# Altium PCB Copy of Marker.PcbDoc
Units mm, origin at the board's own origin, x right, y up, seen from the top; angles counter-clockwise.
Board outline 59.69 x 64.39 mm, 2 copper layers (Top Layer, Bottom Layer); 11 components, 28 nets, 78 pads, 0 vias.
Unrouted connection lines stored in the file: 1.
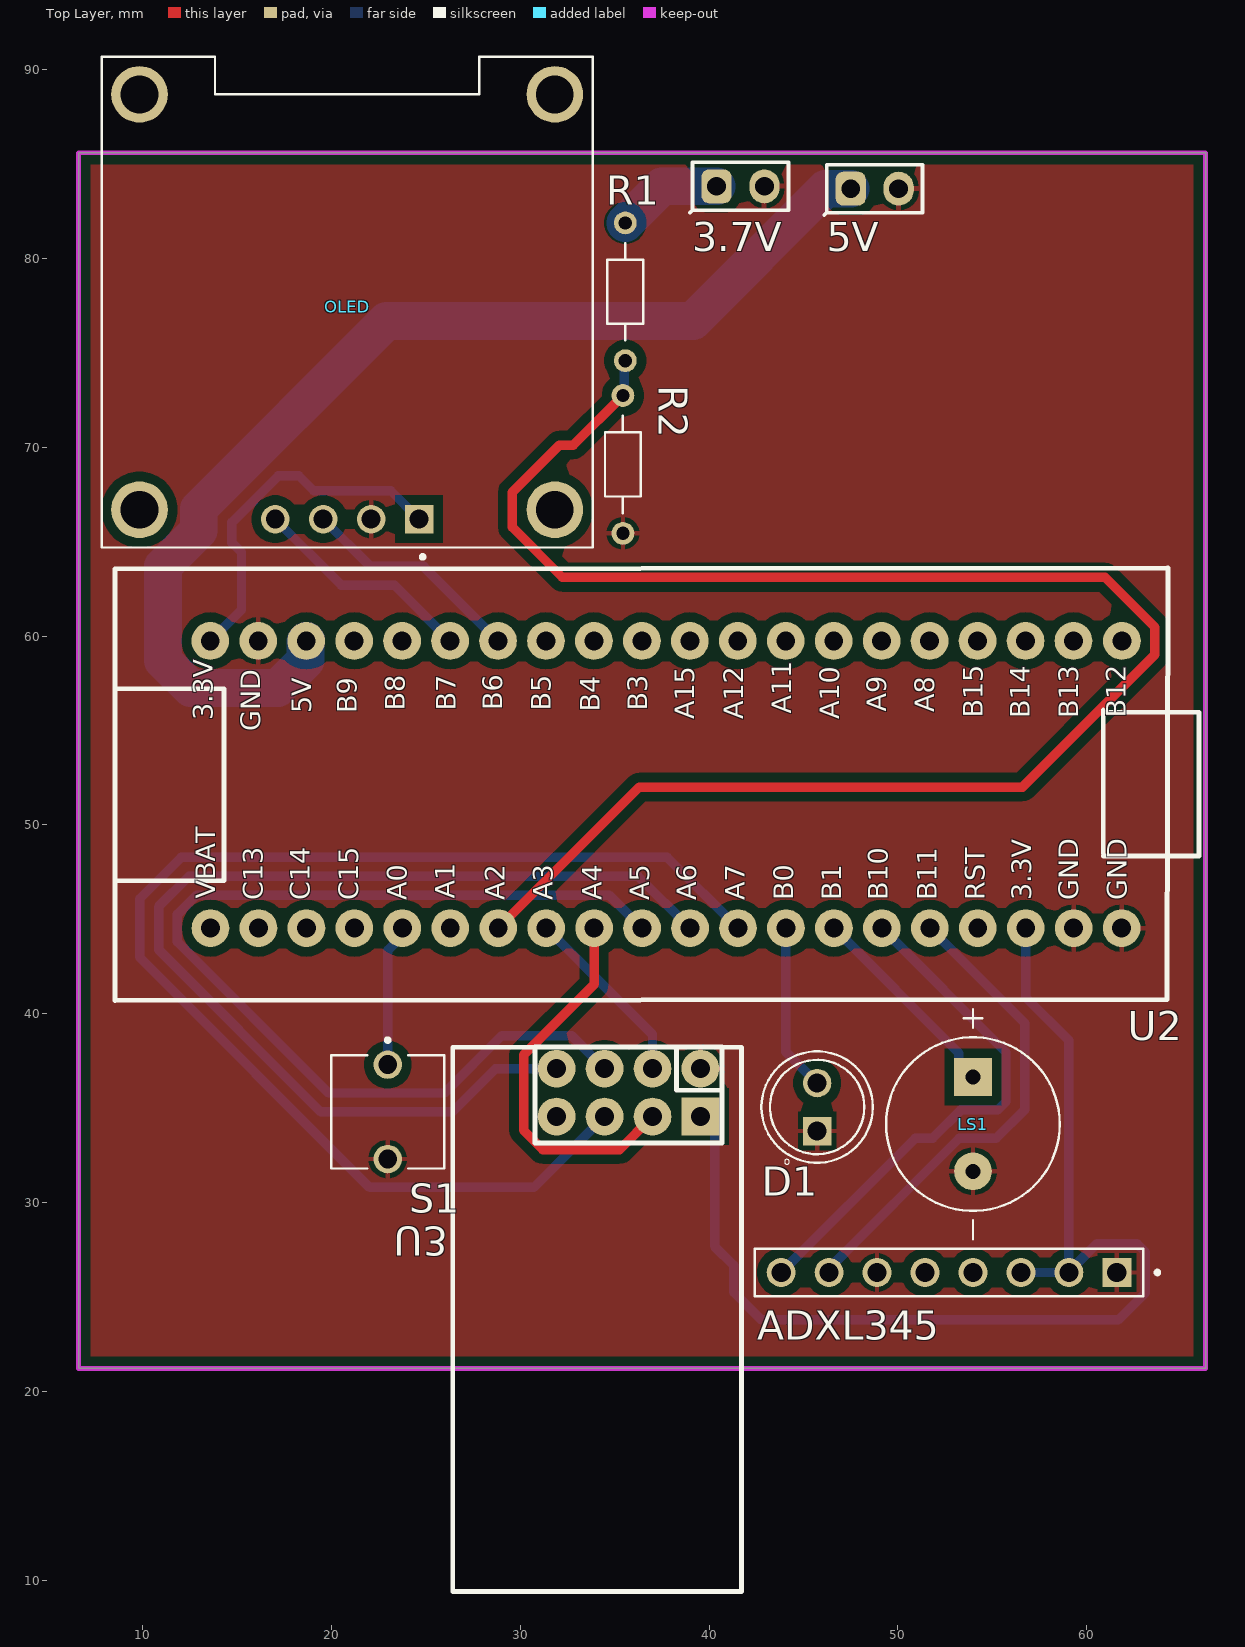
[diagram p0: Top Layer view]
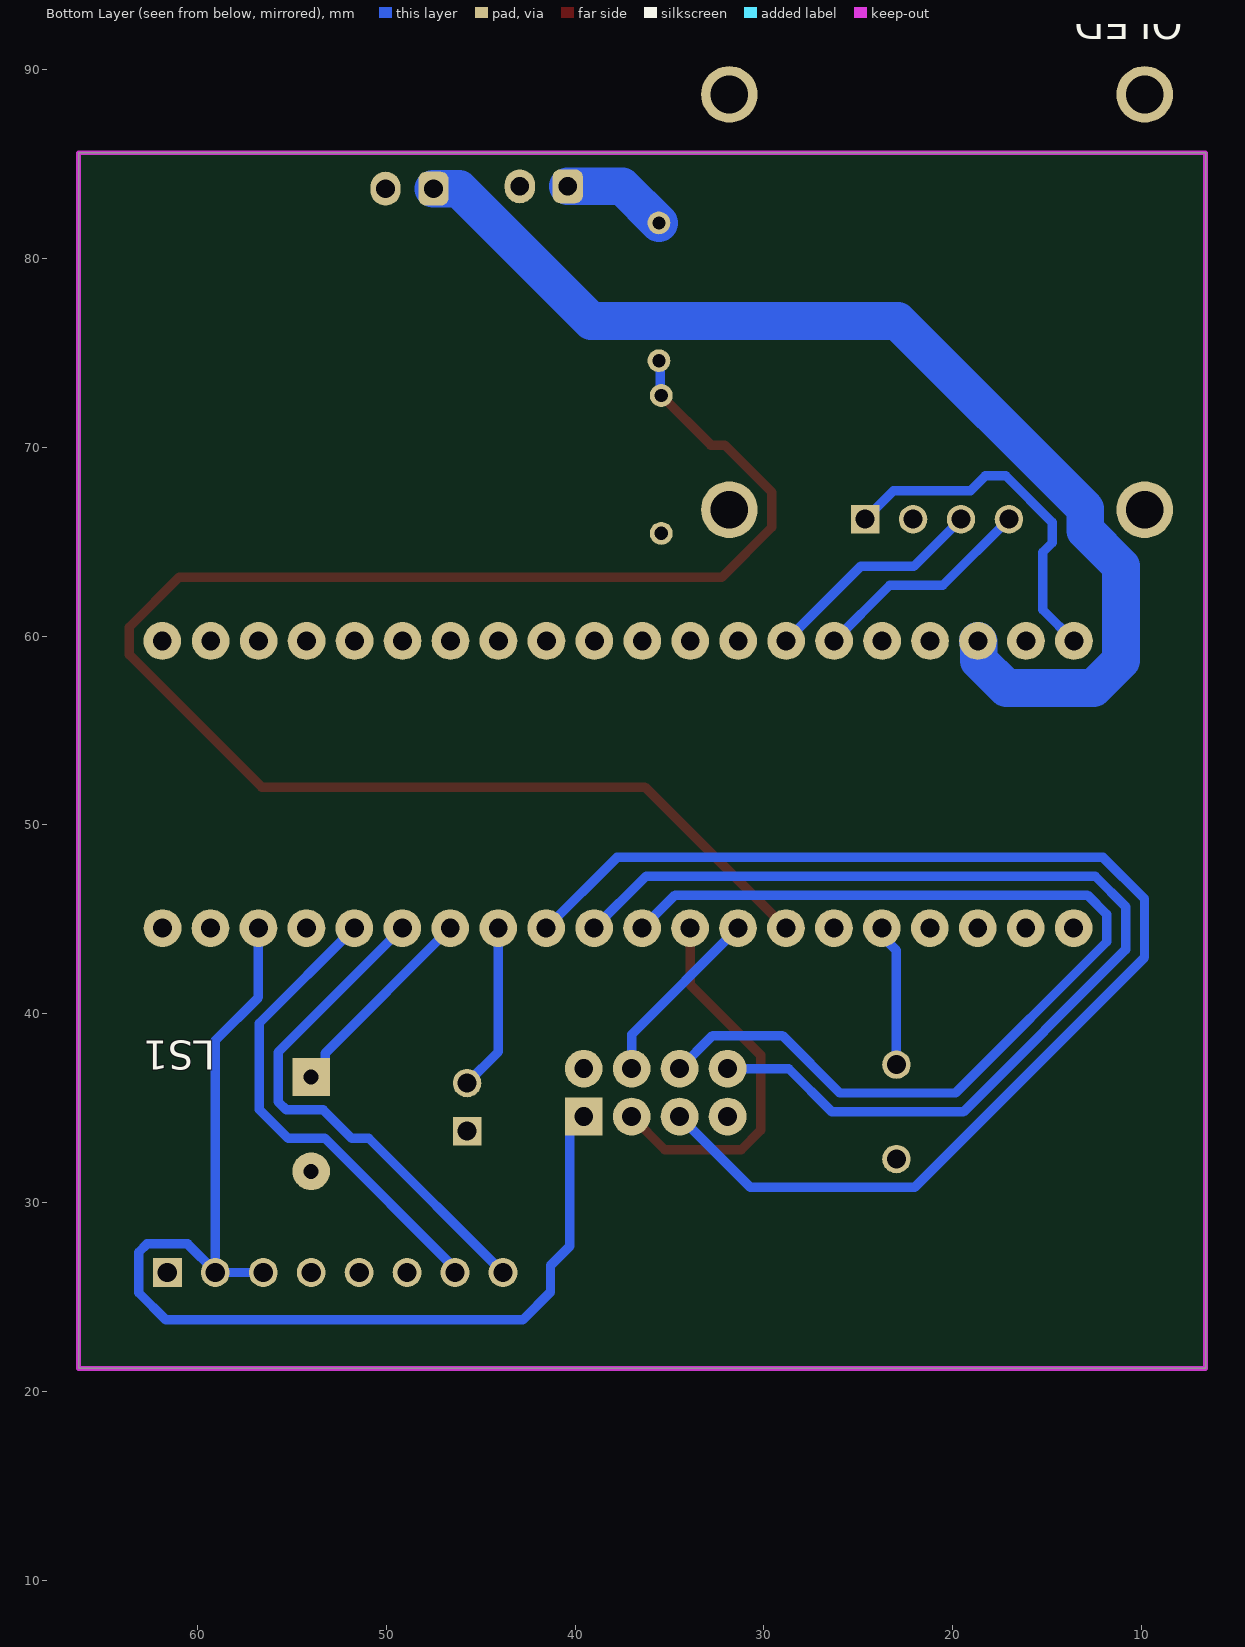
[diagram p1: Bottom Layer view, seen from below]

## Layer stack, top to bottom
Top Solder: solder mask 0.0102, Solder Resist, Dk 3.5
Top Layer: signal copper 0.0356
Dielectric 1: dielectric 0.32, FR-4, Dk 4.8
Bottom Layer: signal copper 0.0356
Bottom Solder: solder mask 0.0102, Solder Resist, Dk 3.5

## Board outline
6.604,21.209 6.604,85.598 66.294,85.598 66.294,21.209

## Design rules (kind name [scope] priority, off if disabled: settings)
Clearance [All] p1: gap=0.5 ignorepadtopadclearanceinfootprint=FALSE
PolygonConnect [All] p1: connectstyle=Relief reliefconductorwidth=0.254 reliefentries=4 polygonreliefangle="90 Angle" airgapwidth=0.254
RoutingVias [All] p1: holewidth=0.7 width=1.5 viastyle="Through Hole" minholewidth=0.7 minwidth=1.5 maxholewidth=0.7 maxwidth=1.5
SolderMaskExpansion [All] p1: expansion=0 istentingtop=FALSE
SupplyNets "Schematic Supply Nets_2" [InNet('3V3')] p1: voltage=0.000
SupplyNets "Schematic Supply Nets_1" [InNet('GND')] p2: voltage=0.000
SupplyNets "Schematic Supply Nets" [InNet('+5V')] p3: voltage=0.000
UnRoutedNet [All] p1: checkbadconnections=TRUE
Width [All] p1: maxlimit=3 minlimit=0.5 preferedwidth=0.5
29 further rules are at their usual default settings.

## Classes and differential pairs
component class Marker: ADXL345 D1 LS1 OLED R1 R2 S1 U2 U3

## Components (designator, comment, footprint, x,y, rotation, side; value= is the part's Value field where it differs from the comment)
3.7V "Comment" HDR/Header/2 41.656,83.82 r0 top
5V "Comment" HDR/Header/2 48.768,83.693 r0 top
ADXL345 "ADXL345" GRAVITECH_8FX1-254MM 52.705,26.289 r180 top
D1 "Led" LED_WP7113SEC/J3 45.72,35.052 r90 top
LS1 "Buzzer" SPKR_CMI-0955-03TH 53.975,34.147 r270 top
OLED "OLED" MODULE_DM-OLED096-636 20.828,77.689 r180 top
R1 "10K" RESAD730W45L370D210 35.56,78.232 r270 top
R2 "10K" RESAD730W45L370D210 35.433,69.088 r270 top
S1 "Button" SW_BUTT-2 22.976,34.798 r270 top
U2 "STM32F103C8T6" "Stm32 BluePill" 31.955,51.914 r90 top
U3 "NRF24L01" NRF24L01 34.071,23.811 r180 top

## Footprints (in the part's own frame and the unit in brackets; to place one, negate y for a bottom-side part, rotate by r counter-clockwise, add the part's x,y. Pads: shape width x height; smd on the part's side, far side on the other; paste and mask are expansions set on the pad)
GRAVITECH_8FX1-254MM [mm]
  rect 1.53x1.53 hole 1.02: 1(-8.89,0)
  round 1.53 hole 1.02: 2(-6.35,0) 3(-3.81,0) 4(-1.27,0) 5(1.27,0) 6(3.81,0) 7(6.35,0) 8(8.89,0)
  silkscreen extent -11.13,-1.25 10.29,1.25, body extent -10.29,-1.25 10.29,1.25, height 8.65
HDR/Header/2 [mm]
  rrect50% 1.6x1.8 hole 1: 1(-1.27,0)
  oval 1.6x1.8 hole 1: 2(1.27,0)
  silkscreen extent -2.67,-1.4 2.54,1.27, body extent -2.54,-1.27 2.54,1.27, height 8.89
LED_WP7113SEC/J3 [mm]
  round 1.508 hole 1: A(1.27,0)
  rect 1.508x1.508 / inner round 1.508 / far side rect 1.508x1.508 hole 1: B(-1.27,0)
  silkscreen extent -3.03,-2.95 2.95,2.95, body extent -2.5,-2.95 2.95,2.95, height 9.6
MODULE_DM-OLED096-636 [mm]
  rect 1.508x1.508 / inner round 1.508 / far side rect 1.508x1.508 hole 1: 1(-3.81,11.5)
  round 1.508 hole 1: 2(-1.27,11.5) 3(1.27,11.5) 4(3.81,11.5)
  round 3 hole 2: S1(-11,11) S2(11,11) S3(11,-11) S4(-11,-11)
  silkscreen extent -13,-13 13,13.6, body extent -13,-13 13,13, height 5.66
NRF24L01 [mm] "MÓDULO TRANSCEPTOR RF WIRELESS 2.4GHZ"
  rect 2x2 hole 1: 1(-5.468,-10.733)
  round 2 hole 1: 2(-2.93,-10.733) 3(-0.39,-10.733) 4(2.15,-10.733) 5(2.15,-13.273) 6(-0.39,-13.273) 7(-2.93,-13.273) 8(-5.47,-13.273)
  silkscreen extent -7.65,-14.42 7.65,14.41, body extent -7.53,-14.41 7.77,14.54, height 7.1
RESAD730W45L370D210 [mm]
  round 1.208 hole 0.7 mask+0.102: 1(-3.65,0) 2(3.65,0)
  silkscreen extent -2.58,-0.95 2.58,0.95, body extent -3.88,-0.95 3.88,0.95, height 1.9
SPKR_CMI-0955-03TH [mm]
  round 2 hole 0.8 mask+0.102: N(2.5,0)
  rect 2x2 / inner round 2 / far side rect 2x2 hole 0.8 mask+0.102: P(-2.5,0)
  silkscreen extent -6.1,-4.6 6.1,4.6, body extent -4.6,-4.6 4.6,4.6, height 10
"Stm32 BluePill" [mm]
  round 2 hole 1: 1(7.828,-29.908) 2(7.828,-27.343) 3(7.828,-24.803) 4(7.828,-22.263) 5(7.828,-19.723) 6(7.828,-17.183) 7(7.828,-14.643) 8(7.828,-12.103) 9(7.828,-9.563) 10(7.828,-7.023) 11(7.828,-4.483) 12(7.828,-1.943) 13(7.828,0.597) 14(7.828,3.137) 15(7.828,5.677) 16(7.828,8.217) 17(7.828,10.757) 18(7.828,13.297) 19(7.828,15.837) 20(7.828,18.377) 21(-7.386,18.366) 22(-7.386,15.826) 23(-7.386,13.286) 24(-7.386,10.746) 25(-7.386,8.206) 26(-7.386,5.666) 27(-7.386,3.126) 28(-7.386,0.586) 29(-7.386,-1.954) 30(-7.386,-4.494) 31(-7.386,-7.034) 32(-7.386,-9.574) 33(-7.386,-12.114) 34(-7.386,-14.654) 35(-7.386,-17.194) 36(-7.386,-19.734) 37(-7.386,-22.274) 38(-7.386,-24.814) 39(-7.386,-27.354) 40(-7.386,-29.894)
  silkscreen extent -11.22,-34 11.69,23.43, body extent -11.18,-33.27 11.68,24.29, height 12.31
SW_BUTT-2 [mm]
  round 1.508 hole 1 mask+0.102: 1(-2.5,0) 2(2.5,0)
  silkscreen extent -3.9,-3 3,3, body extent -3,-3 3,3, height 5.1

## Part data
ADXL345: library part Component_1
D1: library part WP7113SEC/J3, "Red 625nm LED Indication - Discrete 2.2V Radial", Package="Radial Kingbright", Check_prices=https://www.snapeda.com/parts/WP7113SEC/J3/Kingbright/view-part/?ref=eda, MF=Kingbright, MP=WP7113SEC/J3, SnapEDA_Link=https://www.snapeda.com/parts/WP7113SEC/J3/Kingbright/view-part/?ref=snap
LS1: library part CMI-0955-03TH, "Buzzers Indicator, Internally Driven Magnetic 3 V 30mA 2.7kHz 80dB @ 3V, 10cm Through Hole PC Pins", Package=Package, Check_prices=https://www.snapeda.com/parts/CMI-0955-03TH/Same+Sky/view-part/?ref=eda, MF="Same Sky", MP=CMI-0955-03TH, SnapEDA_Link=https://www.snapeda.com/parts/CMI-0955-03TH/Same+Sky/view-part/?ref=snap
OLED: library part DM-OLED096-636, "0.96â€ 128 X 64 MONOCHROME GRAPHIC OLED DISPLAY MODULE - I2C", Package=Package, Check_prices=https://www.snapeda.com/parts/DM-OLED096-636/Display+Module/view-part/?ref=eda, MF="Display Module", MP=DM-OLED096-636, SnapEDA_Link=https://www.snapeda.com/parts/DM-OLED096-636/Display+Module/view-part/?ref=snap
R1 R2: library part MFR-12JT-52-10K, "Carbon Film Resistors - Through Hole 1/6W 10K Ohm", Package="RADIAL-2 Yageo", Check_prices=https://www.snapeda.com/parts/MFR-12JT-52-10K/Yageo/view-part/?ref=eda, MF="Yageo Corporation", MP=MFR-12JT-52-10K, SnapEDA_Link=https://www.snapeda.com/parts/MFR-12JT-52-10K/Yageo/view-part/?ref=snap
S1: library part BUTT-2, "Tactile Switches MINI PUSH BUTTON SWITCH 2-PIN QTY. 4", Package=None, Check_prices=https://www.snapeda.com/parts/BUTT-2/Gravitech/view-part/?ref=eda, MF=Gravitech, MP=BUTT-2, SnapEDA_Link=https://www.snapeda.com/parts/BUTT-2/Gravitech/view-part/?ref=snap
U2: library part BluePill, "Designed By @Alixahedi"
U3: "MÓDULO TRANSCEPTOR RF WIRELESS 2.4GHZ"

## Nets (pads, with @x,y where several pads share a name; then routed paths per layer and width w, separated by ;. In a path a pad name is that pad's centre, name@x,y a point inside that pad or via, vN(x,y) a via of type N, cw(c..) or ccw(c..) an arc to the next point about the centre after c; other vN are vias at no path point)
3V3: ADXL345.2 ADXL345.3 OLED.1 U2.20 U2.38 U3.1 | length 80.8
  Bottom Layer w0.5: U2.20 15.232,61.395 15.232,64.434 14.721,64.944 14.721,66.019 17.188,68.486 18.262,68.486 19.055,67.693 23.134,67.693 OLED.1 ; U3.1 40.289,33.794 40.289,27.673 41.3,26.661 41.3,25.247 42.773,23.774 44.187,23.774 61.671,23.774 63.11,25.213 63.11,27.365 62.671,27.804 60.519,27.804 ADXL345.2@59.055,26.34 ; ADXL345.3 ADXL345.2 ADXL345.2@59.055,26.34 ; U2.38 56.769,40.862 59.055,38.576 ADXL345.2@59.055,26.34
+5V: 5V.1 U2.18 | length 60.2
  Bottom Layer w2: U2.18 18.618,59.702 18.618,58.706 17.154,57.242 12.543,57.242 11.078,58.706 11.078,63.696 12.971,65.589 12.971,66.744 22.913,76.686 39.145,76.686 46.152,83.693 5V.1
A0: 
A3: 
A4: 
A5: 
A6: 
A7: 
B0: 
B1: 
B6: 
B7: 
Button: S1.1 U2.25 | length 7.5
  Bottom Layer w0.5: S1.1 22.976,43.349 23.749,44.122 U2.25
Buzzer: LS1.P U2.34 | length 10.9
  Bottom Layer w0.5: U2.34 53.225,37.911 53.225,37.397 LS1.P
CE: U2.28 U3.7 | length 9.8
  Bottom Layer w0.5: U2.28 37.001,38.895 U3.7
CSN: U2.29 U3.2 | length 20.2
  Top Layer w0.5: U2.29 33.909,41.547 30.171,37.809 30.171,33.819 31.196,32.794 35.251,32.794 U3.2
GND: 3.7V.2 5V.2 ADXL345.1 ADXL345.6 D1.B LS1.N OLED.2 R2.2 S1.2 U2.19 U2.39 U2.40 U3.8
Led: D1.A U2.33 | length 8.9
  Bottom Layer w0.5: U2.33 44.069,37.973 D1.A
MISO: U2.31 U3.5 | length 57.8
  Bottom Layer w0.5: U3.5 28.684,37.084 26.394,34.794 19.433,34.794 10.839,43.388 10.839,45.667 12.45,47.277 36.239,47.277 U2.31
MOSI: U2.32 U3.3 | length 68.5
  Bottom Layer w0.5: U3.3 30.711,30.794 22.019,30.794 9.839,42.974 9.839,46.081 12.036,48.277 37.779,48.277 U2.32
NetBT1_N: 3.7V.1 R1.1 | length 5.6
  Bottom Layer w2: R1.1 37.498,83.82 3.7V.1
NetBT1_P: 
NetR1_2: R1.2 R2.1 U2.27 | length 90.2
  Top Layer w0.5: U2.27 36.303,52.001 56.597,52.001 63.614,59.017 63.614,60.467 60.969,63.112 32.223,63.112 29.578,65.757 29.578,67.621 32.069,70.112 32.807,70.112 R2.1
  Bottom Layer w0.5: R2.1 35.497,72.802 35.497,74.518 R1.2
SCK: U2.30 U3.6 | length 55.1
  Bottom Layer w0.5: U3.6 32.711,38.834 29.02,38.834 25.98,35.794 19.848,35.794 11.839,43.803 11.839,45.252 12.864,46.277 34.699,46.277 U2.30
"SCL (ADXL)": ADXL345.8 U2.35 | length 27.6
  Bottom Layer w0.5: ADXL345.8 50.923,33.397 51.836,33.397 53.336,34.897 55.286,34.897 55.725,35.337 55.725,37.958 49.156,44.527 U2.35
"SCL (OLED)": OLED.3 U2.14 | length 11.9
  Bottom Layer w0.5: OLED.3 22.062,63.685 23.159,63.685 24.875,63.685 U2.14
"SDA (ADXL)": ADXL345.7 U2.36 | length 25.8
  Bottom Layer w0.5: ADXL345.7 46.355,26.502 53.25,33.397 55.2,33.397 56.725,34.922 56.725,39.491 U2.36
"SDA (OLED)": OLED.4 U2.15 | length 11.9
  Bottom Layer w0.5: OLED.4 20.522,62.685 23.335,62.685 U2.15
pads on no net: ADXL345.4 ADXL345.5 OLED.S1 OLED.S2 OLED.S3 OLED.S4 U2.1 U2.2 U2.3 U2.4 U2.5 U2.6 U2.7 U2.8 U2.9 U2.10 U2.11 U2.12 U2.13 U2.16 U2.17 U2.21 U2.22 U2.23 U2.24 U2.26 U2.37 U3.4

## Polygon pours and split planes (outlines as drawn)
no net on Bottom Layer "NONET_L02_P002" (solid, pour order 2): 6.604,21.209 66.294,21.209 6.604,21.209
no net on Bottom Layer "NONET_L02_P000" (solid, pour order 0): 6.604,21.209 66.294,21.209 6.604,21.209
GND on Top Layer "GND_L01_P005" (solid, pour order 5): 6.604,85.598 6.604,21.209 66.294,21.209 66.294,85.598

## Keep-outs
Keep-Out Layer:
  the board outline again, w0.254

## Dimensions
66.294,85.852 to 66.294,21.209 on Bottom Layer
6.604,85.598 to 66.294,85.598 on Bottom Layer

## Text inside footprints (layer, text, board x,y; h text height)
U2: Top Overlay "5V" at 19.261,55.907 h1.78 r90; Top Overlay "B9" at 21.674,55.907 h1.78 r90; Top Overlay "B8" at 24.214,56.034 h1.78 r90; Top Overlay "3.3V" at 14.054,55.526 h1.78 r90; Top Overlay "GND" at 16.568,54.962 h1.78 r90; Top Overlay "A5" at 37.168,46.001 h1.78 r90; Top Overlay "A2" at 29.517,46.001 h1.78 r90; Top Overlay "A3" at 32.062,46.001 h1.78 r90; Top Overlay "A4" at 34.647,46.001 h1.78 r90; Top Overlay "RST" at 54.948,46.001 h1.78 r90; Top Overlay "B10" at 49.817,46.001 h1.78 r90; Top Overlay "B11" at 52.402,46.001 h1.78 r90; Top Overlay "A6" at 39.657,46.001 h1.78 r90; Top Overlay "A7" at 42.242,46.001 h1.78 r90; Top Overlay "B0" at 44.788,46.001 h1.78 r90; Top Overlay "B1" at 47.347,46.001 h1.78 r90; Top Overlay "3.3V" at 57.411,46.001 h1.78 r90; Top Overlay "B15" at 54.846,55.663 h1.78 r90; Top Overlay "A8" at 52.281,55.97 h1.78 r90; Top Overlay "A11" at 44.706,55.886 h1.78 r90; Top Overlay "B3" at 37.066,56.034 h1.78 r90; Top Overlay "A9" at 49.715,56.001 h1.78 r90; Top Overlay "A15" at 39.555,55.599 h1.78 r90; Top Overlay "A12" at 42.14,55.599 h1.78 r90; Top Overlay "A10" at 47.226,55.599 h1.78 r90; Top Overlay "VBAT" at 14.175,46.073 h1.78 r90; Top Overlay "B5" at 31.961,56.034 h1.78 r90; Top Overlay "B14" at 57.33,55.632 h1.78 r90; Top Overlay "B7" at 26.926,56.034 h1.78 r90; Top Overlay "B4" at 34.546,56.001 h1.78 r90; Top Overlay "B6" at 29.395,56.064 h1.78 r90; Top Overlay "C15" at 21.75,46.001 h1.78 r90; Top Overlay "C13" at 16.695,46.001 h1.78 r90; Top Overlay "C14" at 19.184,46.001 h1.78 r90; Top Overlay "A0" at 24.315,46.001 h1.78 r90; Top Overlay "A1" at 26.875,46.072 h1.78 r90; Top Overlay "GND" at 59.901,46.001 h1.78 r90; Top Overlay "B13" at 59.901,55.653 h1.78 r90; Top Overlay "GND" at 62.466,46.001 h1.78 r90; Top Overlay "B12" at 62.41,55.663 h1.78 r90